# Altium PCB PCB2.PcbDoc
Units mm, origin at the board's own origin, x right, y up, seen from the top; angles counter-clockwise.
Board outline 98.93 x 70.99 mm, 2 copper layers (Top Layer, Bottom Layer); 36 components, 33 nets, 117 pads, 16 vias.
Unrouted connection lines stored in the file: 2.
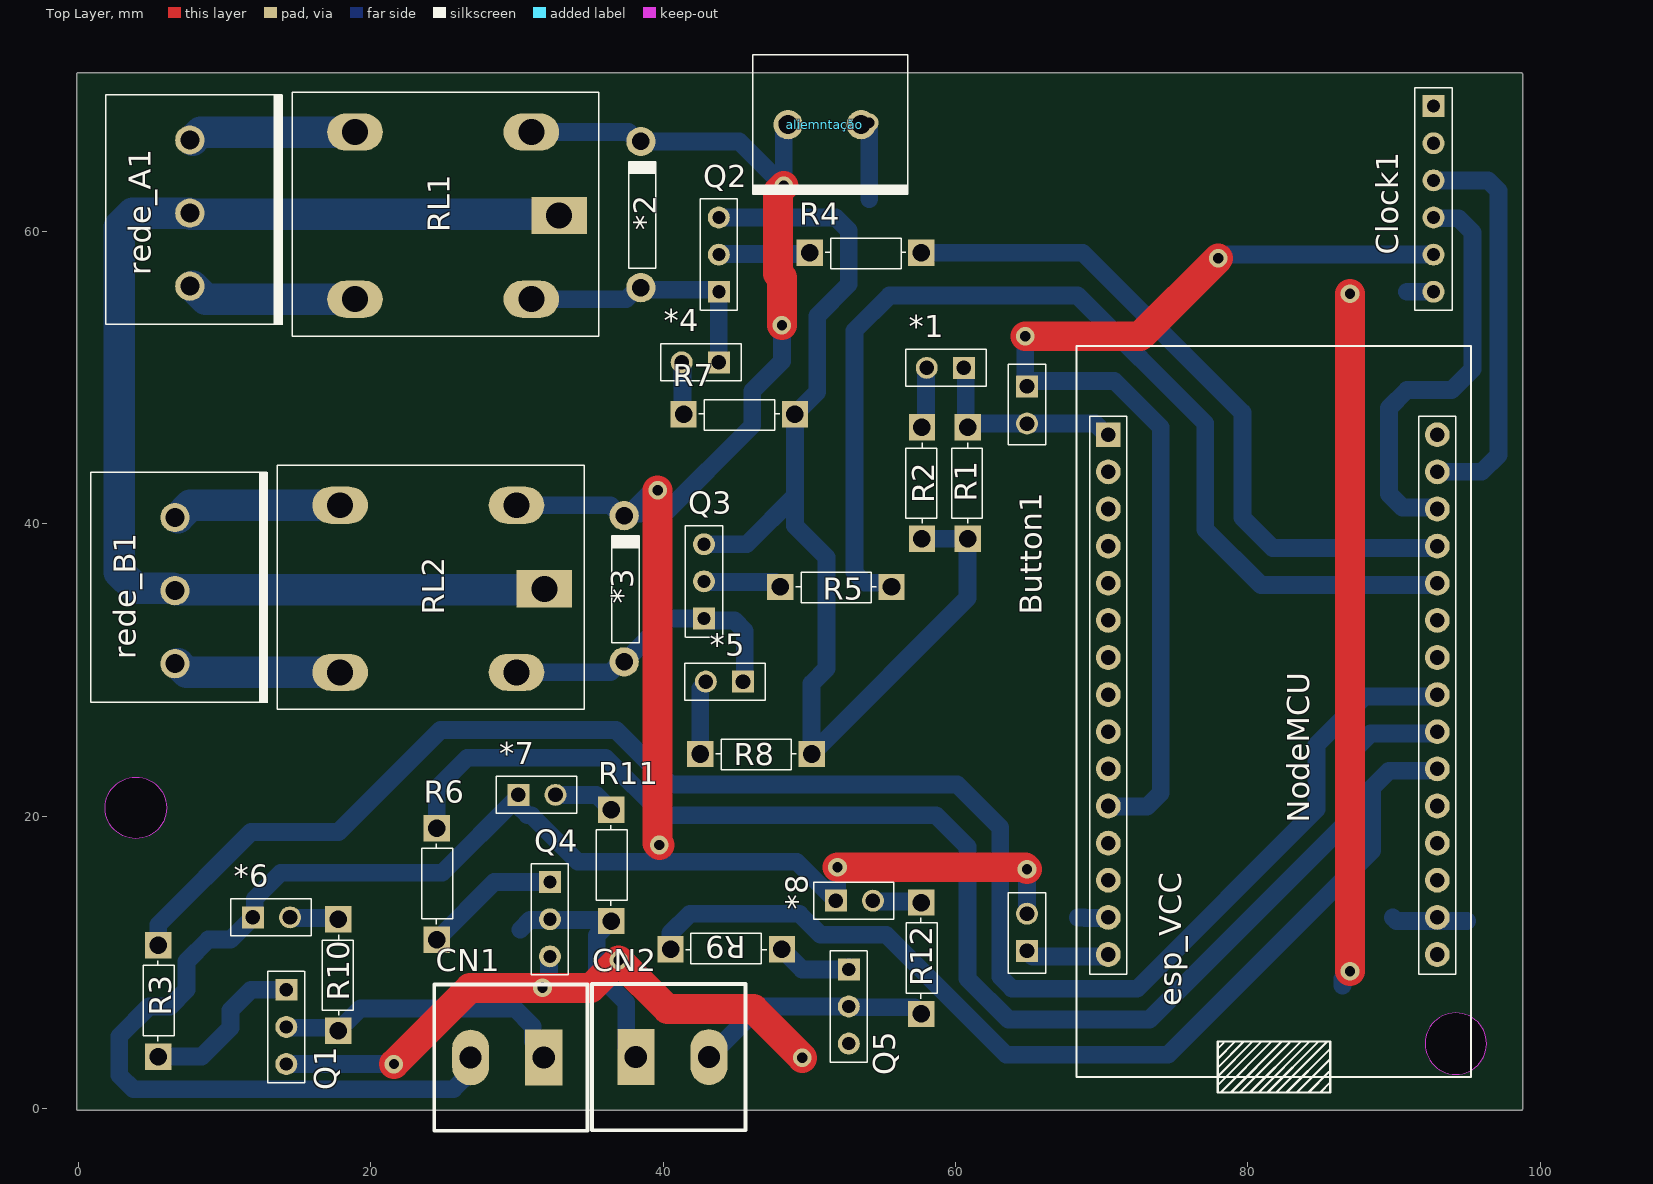
[diagram p0: Top Layer view]
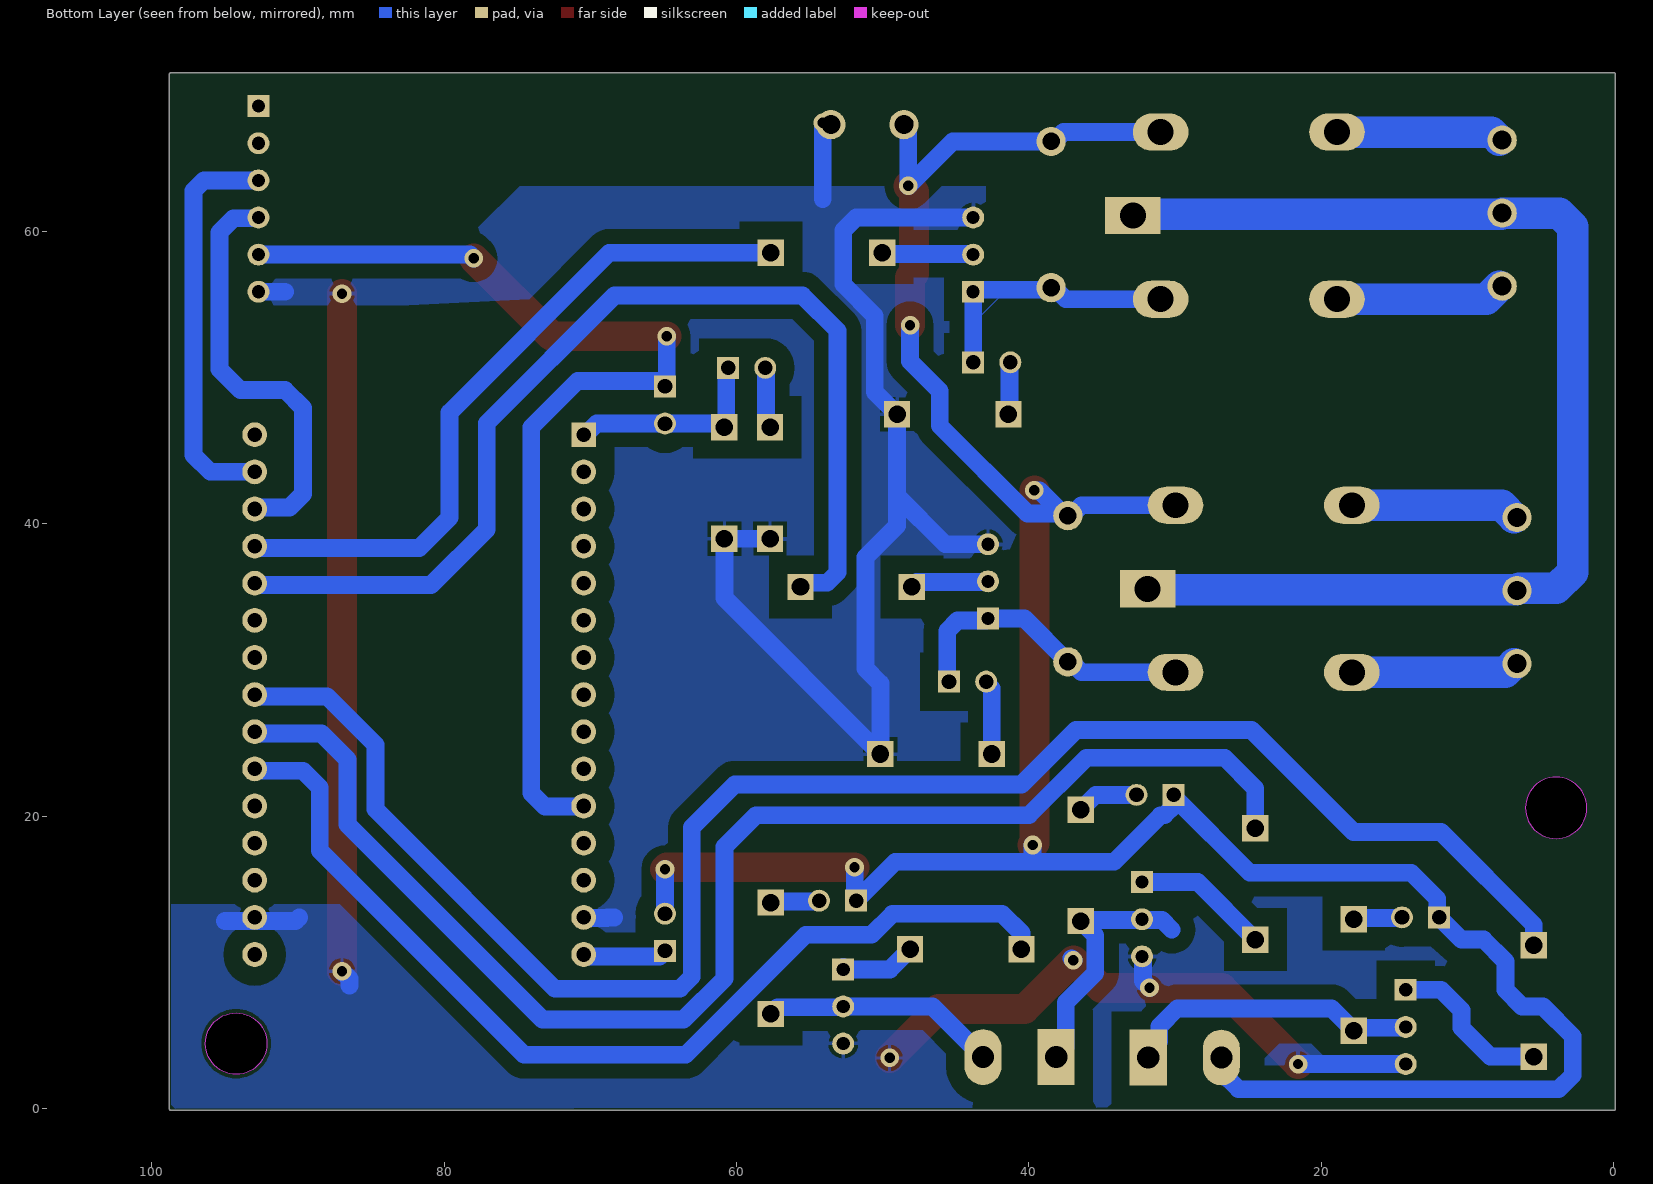
[diagram p1: Bottom Layer view, seen from below]
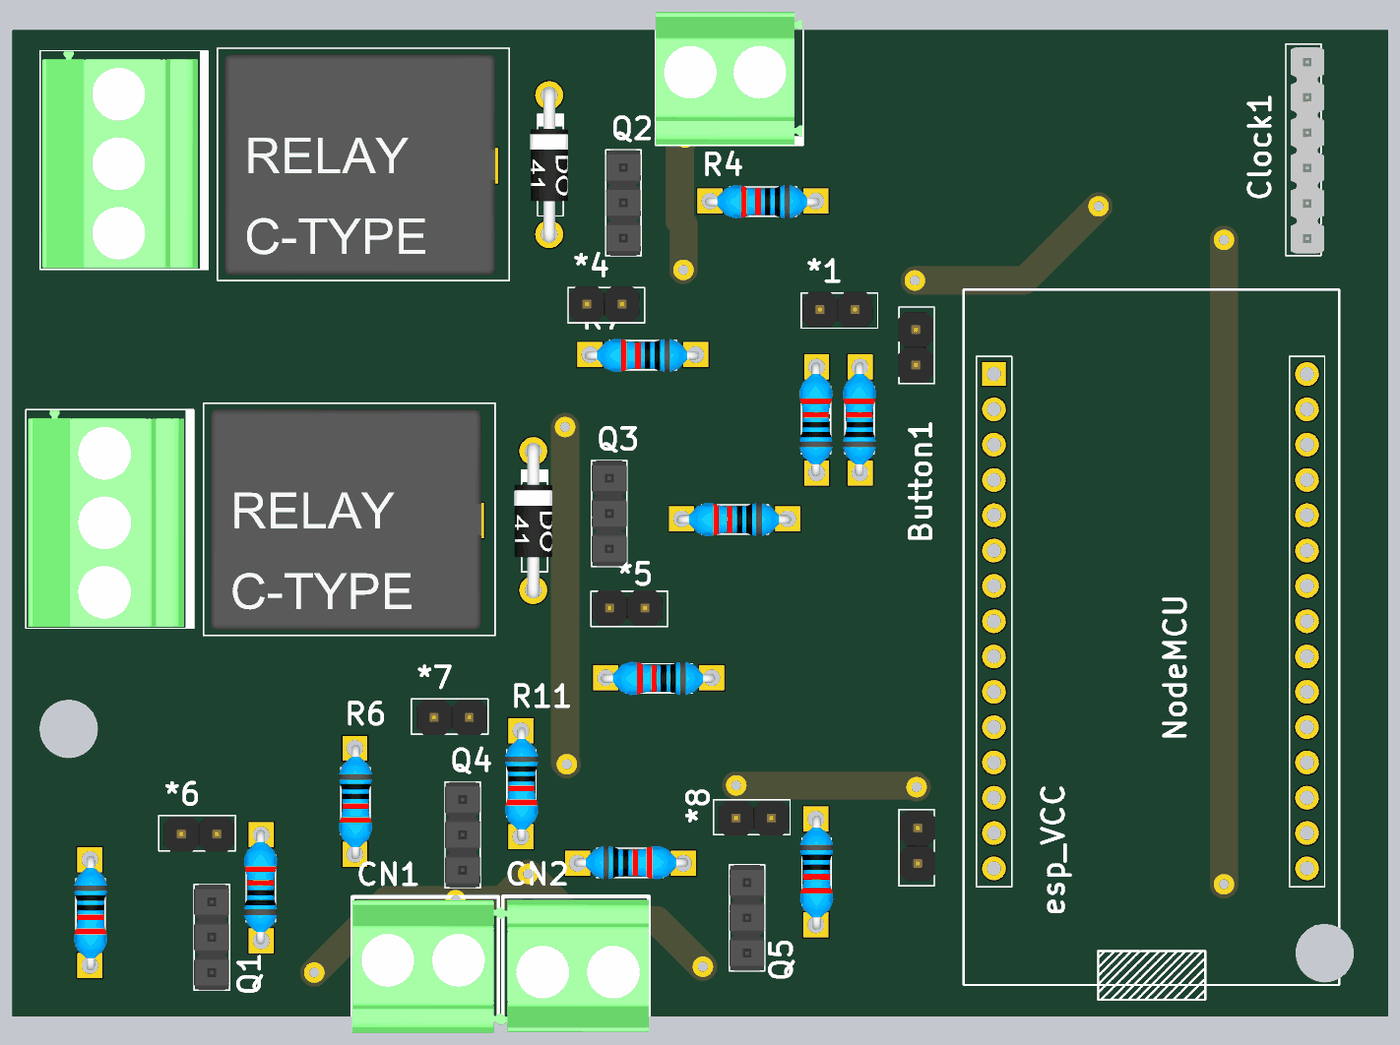
[diagram p2: 3D render of the assembled board from above, using the file's embedded part models]

## Layer stack, top to bottom
Top Solder: solder mask 0.0102, Solder Resist, Dk 3.5
Top Layer: signal copper 0.0356
Dielectric 1: dielectric 0.32, FR-4, Dk 4.8
Bottom Layer: signal copper 0.0356
Bottom Solder: solder mask 0.0102, Solder Resist, Dk 3.5

## Board outline
-0.127,0 ccw(c0,0) 0,-0.127 98.679,-0.127 ccw(c98.679,0) 98.806,0 98.806,70.739 ccw(c98.679,70.739) 98.679,70.866 0,70.866 ccw(c0,70.739) -0.127,70.739
cut-out: 3.937,18.472 cw(c3.937,20.574) 1.835,20.574 cw(c3.937,20.574) 3.937,22.676 cw(c3.937,20.574) 6.039,20.574 cw(c3.937,20.574)
cut-out: 92.132,4.445 ccw(c94.234,4.445) 94.234,2.343 ccw(c94.234,4.445) 96.336,4.445 ccw(c94.234,4.445) 94.234,6.547 ccw(c94.234,4.445)

## Design rules (kind name [scope] priority, off if disabled: settings)
Clearance [All] p1: gap=0.254 ignorepadtopadclearanceinfootprint=FALSE except(0: Arc-Hole Track-Hole SMDPad-Hole THPad-Hole Via-Hole Text-Hole; 1.016: Arc-Fill Arc-Poly Arc-Region Track-Fill Track-Poly Track-Region; 1.27: THPad-Fill THPad-Poly THPad-Region Fill-Hole Poly-Hole Region-Hole)
PolygonConnect [All] p1: connectstyle=Relief reliefconductorwidth=0.254 reliefentries=4 polygonreliefangle="90 Angle" airgapwidth=0.254
RoutingVias [All] p1: holewidth=0.711 width=1.27 viastyle="Through Hole" minholewidth=0.711 minwidth=1.27 maxholewidth=0.711 maxwidth=1.27
SolderMaskExpansion [All] p1: expansion=0.102
Width [All] p1: maxlimit=2.286 minlimit=1.143 preferedwidth=2.032 toplayer_minwidth=2.032 toplayer_maxwidth=2.032 bottomlayer_prefwidth=1.219 minimp=50.000000 maximp=50.000000 favimp=50.000000
30 further rules are at their usual default settings.

## Classes and differential pairs
component class "Relógio digital": Clock1
component class "Relay de carga": *2 *3 *4 *5 Q2 Q3 R4 R5 R7 R8 rede_A1 rede_B1 RL1 RL2
component class "Microcontrolador ESP8266": aliemntação esp_VCC NodeMCU
component class "Fita LED": *6 *7 *8 CN1 CN2 Q1 Q4 Q5 R3 R6 R9 R10 R11 R12
component class Botão: *1 Button1 R1 R2

## Components (designator, comment, footprint, x,y, rotation, side; value= is the part's Value field where it differs from the comment)
*1 "LED_AXIAL_5MM" HEADER_1X2 59.309,50.673 r180 top value=?
*2 "DIO_PTH_1N4007" DIO_PTH_DO41 38.481,61.162 r270 top value=?
*3 "DIO_PTH_1N4007" DIO_PTH_DO41 37.338,35.56 r270 top value=?
*4 "LED_AXIAL_5MM" HEADER_1X2 42.545,51.054 r180 top value=?
*5 "LED_AXIAL_5MM" HEADER_1X2 44.196,29.21 r180 top value=?
*6 "LED_AXIAL_5MM" HEADER_1X2 13.208,13.081 r0 top value=?
*7 "LED_AXIAL_5MM" HEADER_1X2 31.369,21.463 r0 top value=?
*8 "LED_AXIAL_5MM" HEADER_1X2 53.086,14.224 r0 top value=?
aliemntação "?" CN_KRE_2 51.054,67.31 r0 top
Button1 "?" HEADER_1X2 64.897,48.133 r270 top
Clock1 "HEADER_1X6" HEADER_1X6 92.71,62.23 r270 top value=?
CN1 "MKDS" MKDSN02 29.337,3.492 r180 top
CN2 "MKDS" MKDSN02 40.64,3.524 r0 top
esp_VCC "?" HEADER_1X2 64.897,12.065 r90 top
NodeMCU "ESP8266 Development kit" DIV_NodeMCU_Socket 68.148,2.097 r0 top
Q1 "NPN" HEADER_1X3 15.494,5.588 r270 top
Q2 "NPN" HEADER_1X3 42.545,58.42 r90 top
Q3 "NPN" HEADER_1X3 41.529,36.068 r90 top
Q4 "NPN" HEADER_1X3 33.528,12.954 r270 top
Q5 "NPN" HEADER_1X3 53.975,6.985 r270 top
R1 "1M" RES_PTH_7.62MM 60.833,42.799 r90 top
R2 "" RES_PTH_7.62MM 57.708,42.799 r90 top value=330
R3 "10k" RES_PTH_7.62MM 5.461,7.366 r270 top
R4 "10k" RES_PTH_7.62MM 53.848,58.547 r180 top
R5 "10k" RES_PTH_7.62MM 51.816,35.687 r180 top
R6 "10k" RES_PTH_7.62MM 24.511,15.367 r270 top
R7 "330" RES_PTH_7.62MM 45.212,47.498 r180 top
R8 "330" RES_PTH_7.62MM 46.355,24.257 r180 top
R9 "10k" RES_PTH_7.62MM 44.323,10.904 r0 top
R10 "330" RES_PTH_7.62MM 17.78,9.144 r90 top
R11 "330" RES_PTH_7.62MM 36.449,16.637 r270 top
R12 "330" RES_PTH_7.62MM 57.658,10.287 r270 top
rede_A1 "?" CN_KRE_3 7.62,61.261 r90 top
rede_B1 "?" CN_KRE_3 6.604,35.433 r90 top
RL1 "RELEICR5551" DIV_RELE_5551 25.908,61.087 r0 top
RL2 "RELEICR5551" DIV_RELE_5551 24.892,35.56 r0 top

## Footprints (in the part's own frame and the unit in brackets; to place one, negate y for a bottom-side part, rotate by r counter-clockwise, add the part's x,y. Pads: shape width x height; smd on the part's side, far side on the other; paste and mask are expansions set on the pad)
CN_KRE_2 [mm]
  round 2 hole 1.3: 1(-2.5,0) 2(2.5,0)
  silkscreen extent -4.93,-4.75 5.69,4.8, body extent -4.93,-4.7 5.64,4.8, height 15
CN_KRE_3 [mm]
  round 2 hole 1.3: 1(-5,0) 2(0,0) 3(5,0)
  silkscreen extent -7.67,-6.38 8.1,5.74, body extent -7.53,-5.61 8.04,5.59, height 18
DIO_PTH_DO41 [mm]
  round 2 hole 1.2: A(5,0) K(-5,0)
  silkscreen extent -3.62,-0.86 3.69,1.02, body extent -5.65,-1.36 5.71,1.36, height 1.36
DIV_NodeMCU_Socket [mm]
  rect 1.7x1.7 hole 1: 1(2.31,44.004)
  round 1.7 hole 1: 2(2.31,41.464) 3(2.31,38.924) 4(2.31,36.384) 5(2.31,33.844) 6(2.31,31.304) 7(2.31,28.764) 8(2.31,26.224) 9(2.31,23.684) 10(2.31,21.144) 11(2.31,18.604) 12(2.31,16.064) 13(2.31,13.524) 14(2.31,10.984) 15(2.31,8.444) 16(24.816,8.444) 17(24.816,10.984) 18(24.816,13.524) 19(24.816,16.064) 20(24.816,18.604) 21(24.816,21.144) 22(24.816,23.684) 23(24.816,26.224) 24(24.816,28.764) 25(24.816,31.304) 26(24.816,33.844) 27(24.816,36.384) 28(24.816,38.924) 29(24.816,41.464) 30(24.816,44.004)
  silkscreen extent 0.13,-1 27.13,50.08
DIV_RELE_5551 [mil]
  rect 150x100 hole 70: 1(275,0)
  oval 150x100 hole 70: 2(-275,-225) 3(-275,225) 4(200,225) 5(200,-225)
  silkscreen extent -444,-325 382,333, body extent -425,-310 343,316, height 87
HEADER_1X2 [mm]
  rect 1.5x1.5 hole 1: 1(-1.27,0)
  round 1.5 hole 1: 2(1.27,0)
  silkscreen extent -2.79,-1.27 2.71,1.27, body extent -2.44,-1.34 2.64,1.2, height 8.5
HEADER_1X3 [mm] "Connector; Header; 3x2 Position"
  rect 1.5x1.5 hole 0.9: 1(-2.54,-1.27)
  round 1.5 hole 0.9: 2(0,-1.27) 3(2.54,-1.27)
  silkscreen extent -3.81,-2.54 3.81,0, body extent -3.81,-2.54 3.81,0, height 9.5
HEADER_1X6 [mm] "Connector; Header; 6 Position"
  rect 1.5x1.5 hole 0.9: 1(-6.35,0)
  round 1.5 hole 0.9: 2(-3.81,0) 3(-1.27,0) 4(1.27,0) 5(3.81,0) 6(6.35,0)
  silkscreen extent -7.62,-1.27 7.62,1.27, body extent -7.38,-3.55 7.46,1.48, height 8.56
MKDSN02 [mm]
  rect 2.54x3.81 hole 1.524: 1(-2.5,0)
  oval 2.54x3.81 hole 1.5: 2(2.5,0)
  silkscreen extent -5.5,-5 5,5, body extent -5.74,-4.74 5,4.76, height 15
RES_PTH_7.62MM [mm]
  rect 1.8x1.8 hole 1.2: 1(-3.81,0) 2(3.81,0)
  silkscreen extent -2.76,-1.01 2.76,1.09, body extent -4.06,-1.15 4.16,1.25, height 3.2

## Part data
aliemntação esp_VCC: library part CN_MKDS_2, "MKDS_2"
Button1: library part HEADER_1X2, "1X2"
Clock1: "1X6"
CN1 CN2: library part CN_2, Digikey=277-5893-ND
NodeMCU: library part NodeMCU, Reference=https://bennthomsen.files.wordpress.com/2015/12/nodemcu_pinout_700-2.png, Schematic=https://raw.githubusercontent.com/nodemcu/nodemcu-devkit/master/Documents/NODEMCU_DEVKIT_SCH.png
Q1 Q2 Q3 Q4 Q5: "NPN Bipolar Transistor", Code_JEDEC=TO-226-AA, LatestRevisionDate=17-Jul-2002, LatestRevisionNote="Re-released for DXP Platform.", PackageDescription="TO, Flat Index; 3 In-Line, Axial Leads; Body Dia. 4.8mm; Leads 0.55 x 0.51 mm (max)", PackageReference=TO-226-AA, Published=8-Jun-2000, Publisher="Altium Limited"
R1 R2 R3 R4 R5 R6 R7 R8 R9 R10 R11 R12: library part RES_PTH_7.62MM, "Pin Through Hole Resistor 7.62mm"
rede_A1 rede_B1: library part CN_MKDS_3, "MKDS_3"

## Via types
v1: diameter 1.27, hole 0.711, Top Layer to Bottom Layer, 16 vias

## Nets (pads, with @x,y where several pads share a name; then routed paths per layer and width w, separated by ;. In a path a pad name is that pad's centre, name@x,y a point inside that pad or via, vN(x,y) a via of type N, cw(c..) or ccw(c..) an arc to the next point about the centre after c; other vN are vias at no path point)
+3v3: Button1.1 Clock1.5 NodeMCU.16 | length 73.4
  Top Layer w2.032: v1(64.77,52.832) 72.644,52.832 v1(77.978,58.166)
  Bottom Layer w1.219: v1(64.77,52.832) 64.78,52.822 64.78,49.52 Button1.1 65.278,49.784 70.866,49.784 74.041,46.609 74.041,21.59 73.117,20.666 70.55,20.666 70.458,20.574 ; v1(77.978,58.166) 77.992,58.166 78.246,58.42 Clock1.5
+12: *2.K *3.K *6.1 *7.1 *8.1 aliemntação.1 CN1.2 esp_VCC.2 RL1.4 RL2.4 | length 195.9
  Top Layer w0.254: v1(39.624,42.291) v1@39.688,42.227 ; v1(48.133,53.594) v1@48.197,53.657 ; v1(51.931,16.51) v1@51.994,16.447
  Top Layer w2.032: v1(39.624,42.291) 39.624,18.161 v1(39.751,18.034) ; v1(48.133,53.594) 48.133,56.856 47.868,57.121 47.868,62.727 v1(48.26,63.119) ; v1(51.931,16.51) 64.77,16.51 v1(64.897,16.383)
  Bottom Layer w1.219: CN1.2 26.837,2.5 25.654,1.317 3.763,1.317 2.794,2.286 2.794,4.953 4.826,6.985 6.26,6.985 7.403,8.128 7.403,10.07 8.89,11.557 10.414,11.557 *6.1 12.065,13.208 12.065,14.351 13.843,16.129 24.896,16.129 29.976,21.209 *7.1@30.099,21.209 ; RL2.4 36.412,41.275 37.127,40.56 *3.K 37.549,40.56 *3.K@37.699,40.709 ; *7.1 *7.1@30.099,21.209 ; RL1.4 37.63,66.802 38.27,66.162 *2.K 45.217,66.162 v1(48.26,63.119) v1(48.26,67.437) ; v1(39.624,42.291) 39.614,42.281 39.271,42.281 *3.K@37.699,40.709 ; v1(39.751,18.034) 39.751,16.891 ; v1(48.133,53.594) 48.133,51.127 46.101,49.095 46.101,46.721 40.09,40.709 *3.K@37.699,40.709 ; v1(51.931,16.51) 51.921,16.5 51.921,14.329 *8.1 49.149,16.891 39.751,16.891 ; esp_VCC.2 v1(64.897,16.383) ; *7.1@30.099,21.209 30.099,20.701 30.734,20.066 30.988,20.066 34.163,16.891 39.751,16.891
GND: aliemntação.2 Clock1.6 NodeMCU.14 NodeMCU.17 Q1.3 Q2.3 Q3.3 Q4.3 Q5.3 R1.1 R2.1 R7.1 R8.1 | length 183.4
  Top Layer w2.032: v1(21.59,3.048) 26.797,8.255 v1(31.752,8.255) 35.06,8.255 v1(36.957,10.152) 40.3,6.809 46.187,6.809 v1(49.53,3.467) ; v1(86.995,9.398) v1(86.995,55.753)
  Bottom Layer w1.219: Q1.3 v1(21.59,3.048) ; v1(31.752,8.255) 31.752,8.269 32.204,8.721 32.204,10.36 Q4.3 ; v1(36.957,10.152) v1@37.092,10.287 ; Q3.3 45.72,38.608 49.022,41.91 ; Q2.3 51.816,60.96 52.705,60.071 52.705,56.388 50.546,54.229 50.546,49.022 R7.1 49.022,41.91 ; 54.102,62.23 v1(54.102,67.437) ; R2.1 R1.1 60.833,34.925 R8.1 50.165,29.083 51.181,30.099 51.181,37.719 49.022,39.878 49.022,41.91 ; 68.369,13.081 68.834,13.081 68.869,13.046 70.366,13.046 70.458,12.954 NodeMCU.14@70.55,13.046 ; 86.487,8.411 86.487,8.876 86.995,9.384 v1(86.995,9.398) ; 89.916,13.081 90.17,12.827 94.996,12.827 ; 90.884,55.88 Clock1.6
Net*1_A: *1.1 Button1.2 NodeMCU.1 R1.2 | length 14.3
  Bottom Layer w1.219: *1.1 60.706,50.546 60.706,46.736 R1.2 61.087,46.863 Button1.2 69.569,46.863 NodeMCU.1@70.458,45.974
Net*1_K: *1.2 R2.2 | length 4.2
  Bottom Layer w1.219: R2.2 57.985,46.886 57.985,50.619 *1.2
Net*2_A: *2.A *4.1 Q2.1 RL1.5 | length 18.1
  Bottom Layer w1.219: RL1.5 37.48,55.372 38.27,56.162 *2.A 38.623,56.02 43.675,56.02 Q2.1 *4.1
Net*3_A: *3.A *5.1 Q3.1 RL2.5 | length 21
  Bottom Layer w1.219: RL2.5 36.412,29.845 37.127,30.56 *3.A 40.306,33.528 Q3.1 42.939,33.388 44.879,33.388 45.593,32.673 45.593,29.337 *5.1
Net*4_K: *4.2 R7.2 | length 3.6
  Bottom Layer w1.219: *4.2 41.329,51 41.329,47.571 R7.2
Net*5_K: *5.2 R8.2 | length 5.1
  Bottom Layer w1.219: R8.2 42.545,28.753 42.926,29.134 *5.2
Net*6_K: *6.2 R10.2 | length 3.4
  Bottom Layer w1.219: *6.2 14.532,13.027 17.707,13.027 R10.2
Net*7_K: *7.2 R11.1 | length 4.2
  Bottom Layer w1.219: *7.2 35.433,21.463 R11.1
Net*8_K: *8.2 R12.1 | length 3.4
  Bottom Layer w1.219: *8.2 54.41,14.17 57.585,14.17 R12.1
NetClock1_3: Clock1.3 NodeMCU.29 | length 27.6
  Bottom Layer w1.219: Clock1.3 96.441,63.5 97.155,62.786 97.155,44.704 96.012,43.561 NodeMCU.29 NodeMCU.29@92.872,43.653
NetClock1_4: Clock1.4 NodeMCU.28 | length 28.9
  Bottom Layer w1.219: Clock1.4 92.764,60.906 94.415,60.906 95.377,59.944 95.377,50.581 93.945,49.149 90.884,49.149 89.662,47.927 89.662,42.037 90.586,41.113 92.872,41.113 NodeMCU.28
NetCN1_1: CN2.1 Q4.2 R11.2 | length 17.4
  Bottom Layer w1.219: 30.226,12.24 30.886,12.9 32.204,12.9 Q4.2 32.312,12.9 36.376,12.9 R11.2 35.458,11.836 35.458,9.279 37.48,7.258 37.48,4.184 CN2.1
NetCN1_2: CN1.1 Q1.2 R10.1 | length 19.2
  Bottom Layer w1.219: Q1.2@14.17,5.642 Q1.2 14.278,5.534 17.58,5.534 R10.1 19.304,6.858 29.845,6.858 31.089,5.614 CN1.1@31.089,4.598
NetCN2_2: CN2.2 Q5.2 R12.2 | length 16.5
  Bottom Layer w1.219: 32.131,3.556 32.242,3.667 ; CN2.2 43.14,3.801 43.75,4.412 44.028,4.412 46.601,6.985 Q5.2 52.759,6.931 57.204,6.931 R12.2
Netesp_VCC_1: esp_VCC.1 NodeMCU.15 | length 5.7
  Bottom Layer w1.219: esp_VCC.1 65.278,10.414 67.791,10.414 NodeMCU.15@70.458,10.414
NetNodeMCU_21: NodeMCU.21 R9.1 | length 68.7
  Bottom Layer w1.219: R9.1 40.513,12.011 41.837,13.335 49.324,13.335 50.772,11.887 55.269,11.887 63.473,3.683 74.549,3.683 88.519,17.653 88.519,21.971 89.662,23.114 90.297,23.114 NodeMCU.21@92.964,23.114
NetNodeMCU_22: NodeMCU.22 R6.1 | length 95.5
  Bottom Layer w1.219: R6.1 24.511,21.906 26.608,24.003 36.068,24.003 40.005,20.066 58.674,20.066 60.833,17.907 60.833,8.89 63.627,6.096 73.279,6.096 86.614,19.431 86.614,23.876 88.392,25.654 90.297,25.654 NodeMCU.22@92.964,25.654
NetNodeMCU_23: NodeMCU.23 R3.1 | length 118.6
  Bottom Layer w1.219: R3.1 5.461,12.573 11.811,18.923 17.795,18.923 24.78,25.908 36.779,25.908 40.513,22.174 60.122,22.174 63.068,19.228 63.068,9.017 63.881,8.204 72.432,8.204 84.709,20.481 84.709,24.892 88.011,28.194 90.297,28.194 NodeMCU.23@92.964,28.194
NetNodeMCU_26: NodeMCU.26 R5.1 | length 72.8
  Bottom Layer w1.219: R5.1 55.336,35.977 53.8,35.977 53.086,36.692 53.086,53.213 55.499,55.626 68.349,55.626 77.089,46.886 77.089,39.624 80.899,35.814 90.297,35.814 NodeMCU.26@92.964,35.814
NetNodeMCU_27: NodeMCU.27 R4.1 | length 47.9
  Bottom Layer w1.219: R4.1 68.707,58.547 79.629,47.625 79.629,40.433 81.708,38.354 90.297,38.354 NodeMCU.27@92.964,38.354
NetQ1_2: Q1.1 R3.2 | length 11.8
  Bottom Layer w1.219: R3.2@5.751,3.266 R3.2 8.436,3.556 10.414,5.534 10.414,6.731 11.811,8.128 Q1.1
NetQ2_2: Q2.2 R4.2 | length 6.3
  Bottom Layer w1.219: Q2.2 43.869,58.474 49.965,58.474 R4.2
NetQ3_2: Q3.2 R5.2 | length 5.4
  Bottom Layer w1.219: Q3.2 42.853,36.014 47.679,36.014 R5.2
NetQ4_2: Q4.1 R6.2 | length 9.4
  Bottom Layer w1.219: R6.2 28.448,15.494 Q4.1
NetQ5_2: Q5.1 R9.2 | length 5.3
  Bottom Layer w1.219: R9.2 49.512,9.525 Q5.1 Q5.1@52.705,9.698
Netrede_A1_1: rede_A1.1 RL1.2 | length 11.7
  Bottom Layer w1.219: rede_A1.1 rede_A1.1@7.831,56.261
  Bottom Layer w2.159: rede_A1.1@7.831,56.261 8.72,55.372 RL1.2
Netrede_A1_2: rede_A1.2 rede_B1.2 RL1.1 RL2.1 | length 83.8
  Bottom Layer w1.219: rede_B1.2@6.455,35.582 rede_B1.2 rede_B1.2@6.667,35.496 ; rede_A1.2 rede_A1.2@7.707,61.174 ; RL2.1@31.813,35.496 RL2.1 ; RL1.1@32.806,61.174 RL1.1
  Bottom Layer w2.159: rede_B1.2@6.455,35.582 3.915,35.582 2.794,36.703 2.794,60.325 3.73,61.261 rede_A1.2 ; rede_B1.2@6.667,35.496 RL2.1@31.813,35.496 ; rede_A1.2@7.707,61.174 RL1.1@32.806,61.174
Netrede_A1_3: rede_A1.3 RL1.3 | length 11.5
  Bottom Layer w1.219: rede_A1.3 rede_A1.3@7.831,66.261
  Bottom Layer w2.159: rede_A1.3@7.831,66.261 8.372,66.802 RL1.3
Netrede_B1_1: rede_B1.1 RL2.2 | length 11.5
  Bottom Layer w1.219: rede_B1.1 rede_B1.1@6.815,30.433
  Bottom Layer w2.159: rede_B1.1@6.815,30.433 7.403,29.845 RL2.2
Netrede_B1_3: rede_B1.3 RL2.3 | length 11.7
  Bottom Layer w1.219: rede_B1.3 rede_B1.3@6.815,40.433
  Bottom Layer w2.159: rede_B1.3@6.815,40.433 7.657,41.275 RL2.3
pads on no net: Clock1.1 Clock1.2 NodeMCU.2 NodeMCU.3 NodeMCU.4 NodeMCU.5 NodeMCU.6 NodeMCU.7 NodeMCU.8 NodeMCU.9 NodeMCU.10 NodeMCU.11 NodeMCU.12 NodeMCU.13 NodeMCU.18 NodeMCU.19 NodeMCU.20 NodeMCU.24 NodeMCU.25 NodeMCU.30

## Polygon pours and split planes (outlines as drawn)
Net*2_A on Bottom Layer "NET*2_A_L02_P006" (solid, remove dead copper, pour order 6): 43.815,53.721 41.529,56.007 43.688,56.007 43.815,55.88
GND on Bottom Layer "GND_L02_P004" (solid, remove dead copper, pour order 4): 0.008,0.119 41.918,36.822 40.076,41.204 41.918,61.333 42.807,63.111 98.687,63.111 98.687,-0.008

## Other copper
Bottom Layer:
  pour cut-out: 86.614,13.97 86.632,13.988 103.632,13.988 103.632,16.51 103.124,17.018
  pour cut-out: 42.938,59.69 42.938,63.587 40.069,60.717
  pour cut-out: 77.927,60.022 74.041,63.908 74.041,64.008 79.629,64.008 80.391,64.77
  pour cut-out: 82.423,54.952 74.59,54.952 74.168,55.374
  pour cut-out: 105.156,51.562
  pour cut-out: 93.744,54.952 80.811,54.952 78.31,52.451 77.304,53.457 75.819,53.457 75.819,53.086 80.899,48.006 82.677,49.784 94.735,49.784
  pour cut-out: 77.659,51.308
  pour cut-out: 72.39,9.998 72.597,9.998 83.554,20.955 83.107,21.402 83.107,34.63 80.485,34.63 75.946,39.169 71.802,35.025 71.802,19.308
  pour cut-out: 72.23,15.367 72.23,12.159 71.374,11.303 71.247,11.43 71.247,14.463
  pour cut-out: 19.95,3.667 19.95,3.694 21.082,4.826 20.955,4.953 19.558,4.953
  pour cut-out: 23.876,2.286 23.876,3.429 22.86,4.445 19.359,4.445 19.685,4.771 19.685,5.826 25.303,5.826 25.527,5.603 25.527,2.286
  pour cut-out: 13.462,2.159 13.462,4.445 11.43,4.445 11.303,4.572 11.303,2.413

## Silkscreen, mask and mechanical layers (free items; w line width, h text height)
Mechanical 1:
  circle w0.254: c3.937,20.574 r2.102
  circle w0.254: c94.234,4.445 r2.102
  lines w0.254: 0,0 98.679,0 98.679,70.739 0,70.739 0,0

## Dimensions
0,0 to 0,70.739 on Mechanical 1
0,0 to 98.679,0 on Mechanical 1